# Altium PCB BW0253.PcbDoc (part 1 of 2)
Units mil, origin at the board's own origin, x right, y up, seen from the top; angles counter-clockwise.
Board outline 984.25 x 939.45 mil, 4 copper layers (Top Layer, MidLayer 1, MidLayer 2, Bottom Layer), stack 63.115 mil thick; 49 components, 37 nets, 139 pads, 74 vias.
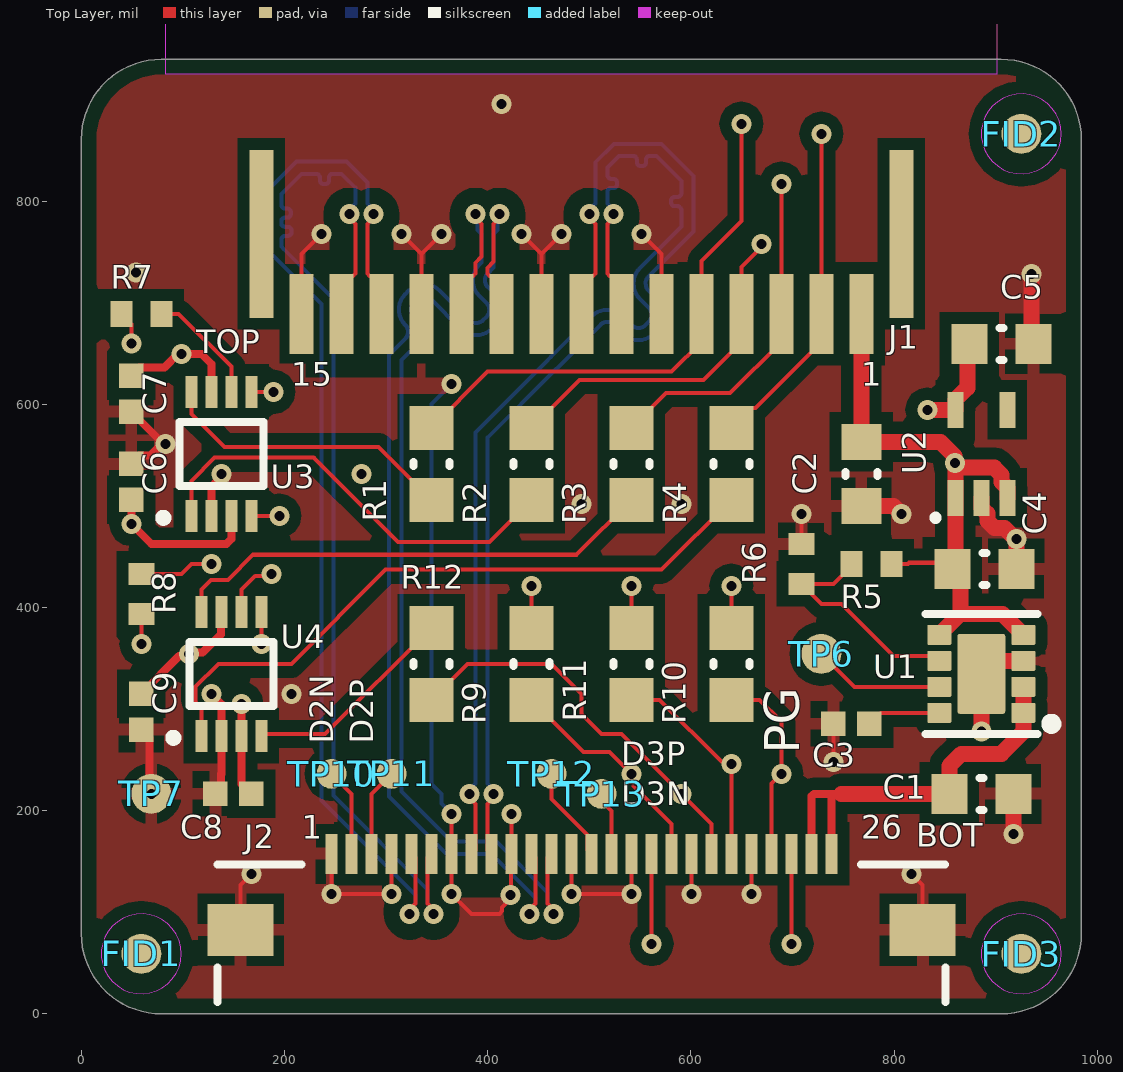
[diagram p0: Top Layer view]
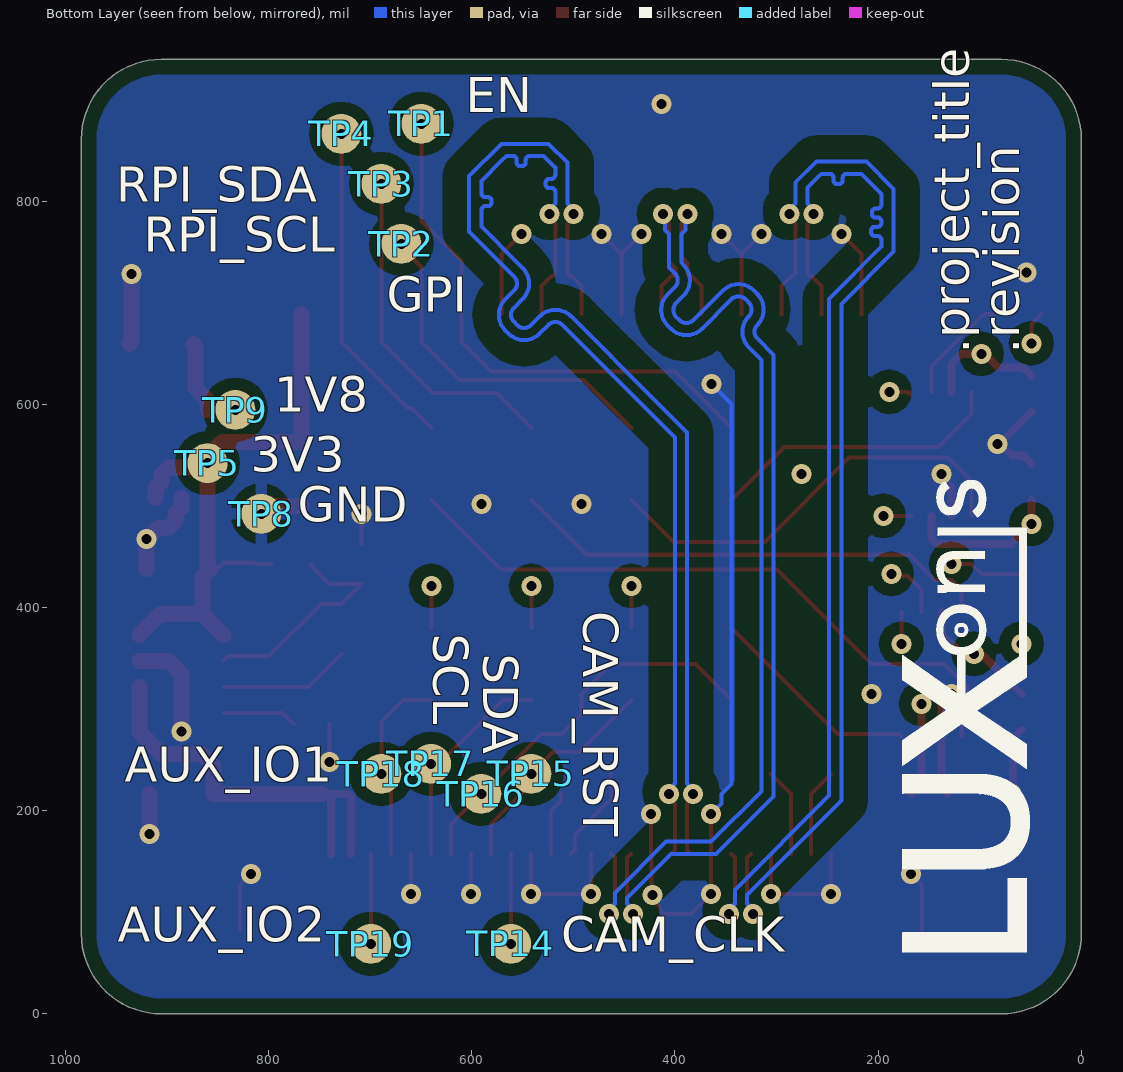
[diagram p1: Bottom Layer view, seen from below]
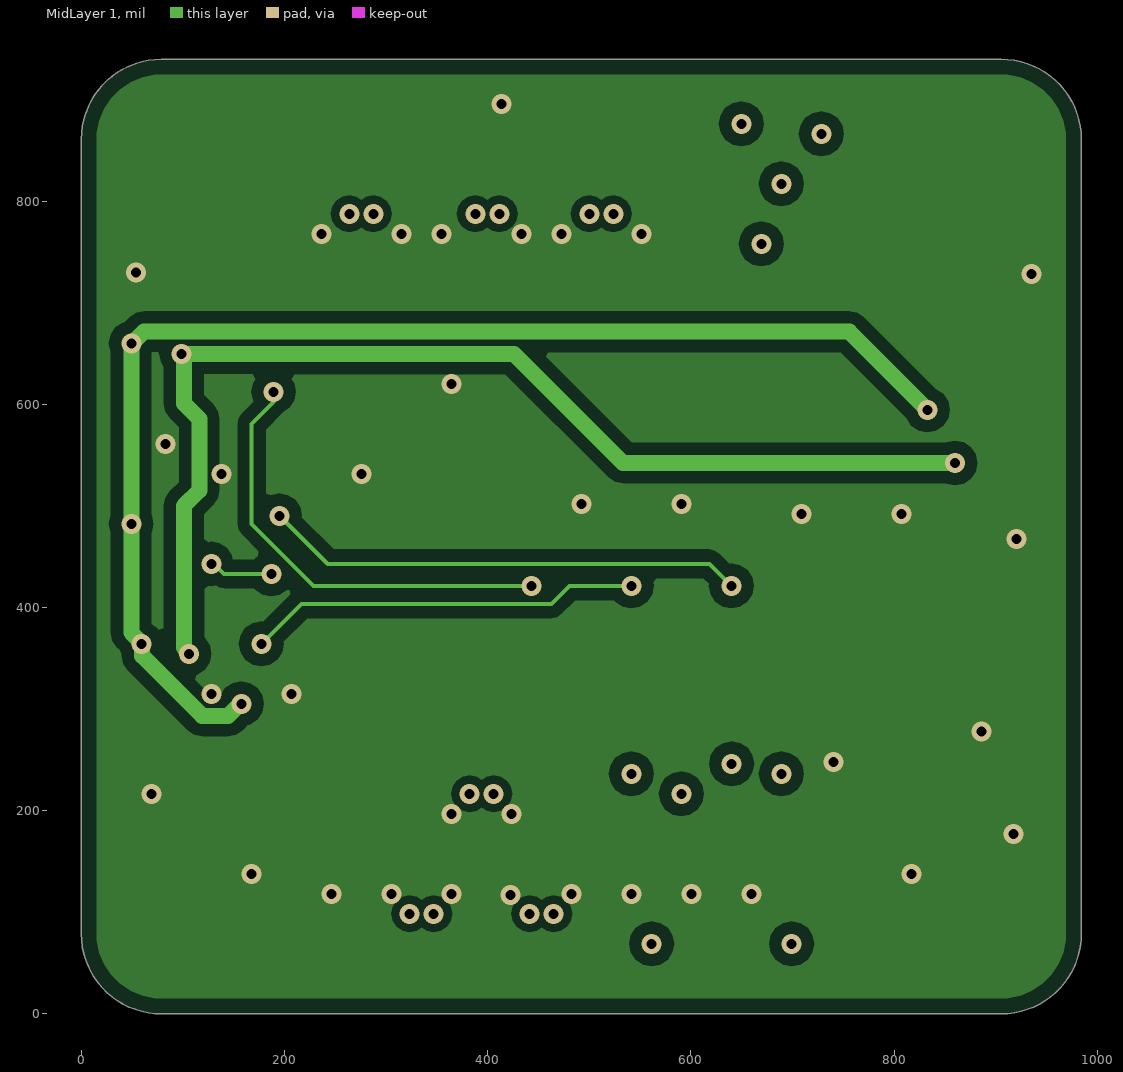
[diagram p2: MidLayer 1]
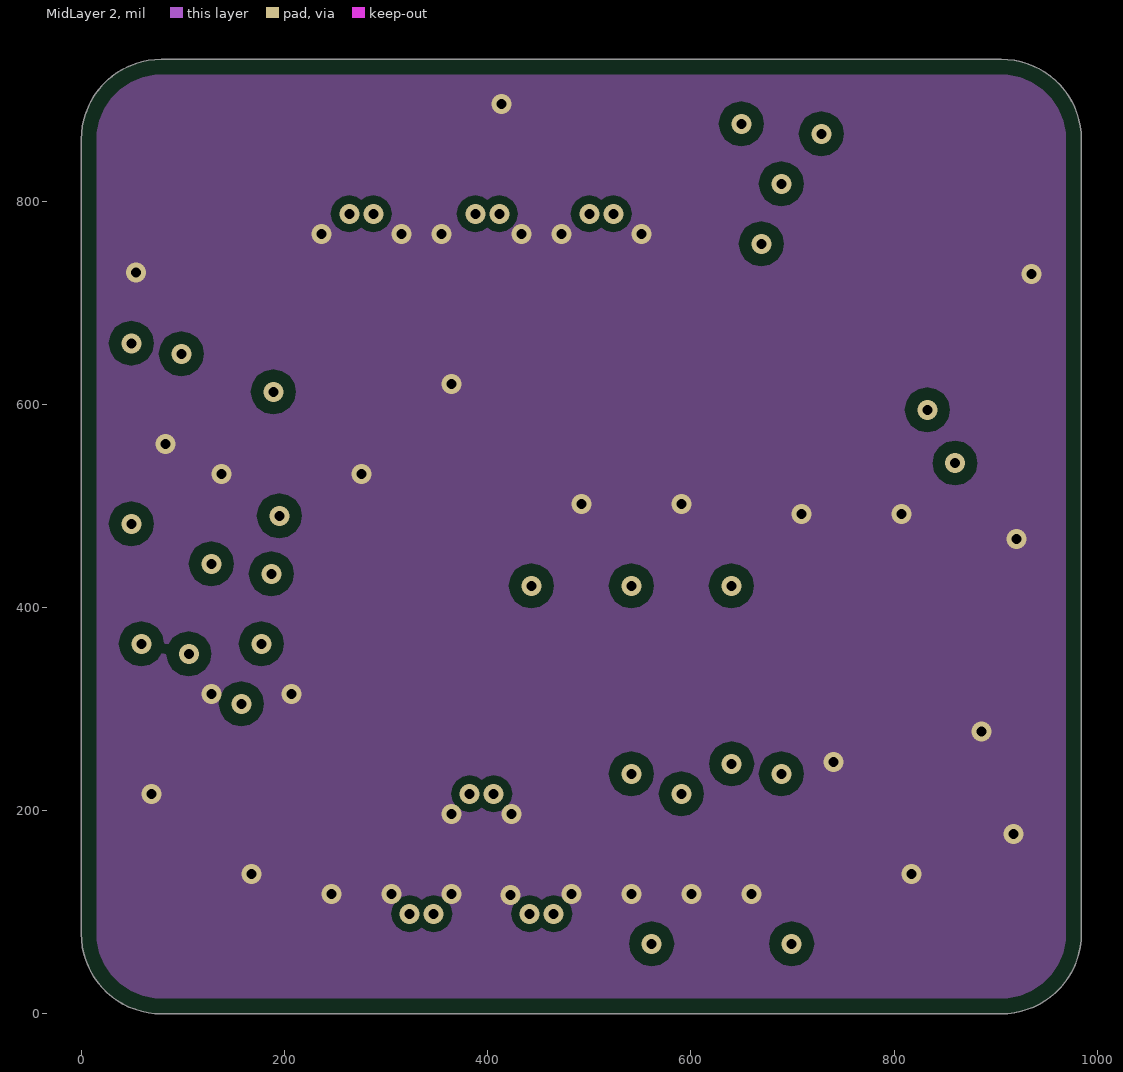
[diagram p3: MidLayer 2]

## Layer stack, top to bottom
Top Solder: solder mask 0.787, Solder Resist, Dk 3.5
Top Layer: signal copper 1.378
Dielectric1: prepreg 3.189, FR-4, Dk 4.3
MidLayer 1: signal copper 1.4
Dielectric3: core 51.181, FR-4, Dk 4.3
MidLayer 2: signal copper 1.4
Dielectric2: prepreg 3.189, FR-4, Dk 4.3
Bottom Layer: signal copper 1.378
Bottom Solder: solder mask 0.787, Solder Resist, Dk 3.5

## Board outline
0,78.74 0,860.71 cw(c78.74,860.71) 78.74,939.45 905.51,939.45 cw(c905.51,860.71) 984.25,860.71 984.25,78.74 cw(c905.51,78.74) 905.51,0 78.74,0 cw(c78.74,78.74)

## Design rules (kind name [scope] priority, off if disabled: settings)
AssemblyTestPointUsage [All] p1 off:
AssemblyTestpoint [All] p1 off: testpointundercomponent=TRUE minsize=40 maxsize=100 preferedsize=60 minholesize=0 maxholesize=40 preferedholesize=32 testpointgrid=1 usegrid=TRUE gridtolerance=0.01 allowsidetop=TRUE allowsidebottom=TRUE
BoardOutlineClearance [All] p1: gap=15 ignorepadtopadclearanceinfootprint=FALSE
Clearance Clearance_2 [InPolygon vs InNetClass('SENSORMIPI')] p1: gap=23.62 ignorepadtopadclearanceinfootprint=FALSE except(0: Arc-Hole Track-Hole SMDPad-Hole THPad-Hole Via-Hole Fill-Hole Poly-Hole Region-Hole Text-Hole; 7.87: Arc-Via Track-Via SMDPad-Via THPad-Via Via-Via Via-Fill Via-Poly Via-Region Via-Text)
Clearance Clearance_3 [InNamedPolygon('GND_L04_P018')] p2: gap=15.75 ignorepadtopadclearanceinfootprint=FALSE except(0: Arc-Hole Track-Hole SMDPad-Hole THPad-Hole Via-Hole Fill-Hole Poly-Hole Region-Hole Text-Hole)
Clearance Clearance_1 [InPolygon] p3: gap=11.81 ignorepadtopadclearanceinfootprint=FALSE except(0: Arc-Hole Track-Hole SMDPad-Hole THPad-Hole Via-Hole Fill-Hole Poly-Hole Region-Hole Text-Hole)
Clearance [All] p4: gap=4 ignorepadtopadclearanceinfootprint=FALSE
ComponentClearance [All] p1 off: gap=10 collisioncheckmode=3 verticalgap=10 showdistances=FALSE
DiffPairsRouting [InDifferentialPairClass('All Differential Pairs')] p1: maxlimit=15.75 minlimit=8 mostfreqgap=10 toplayer_prefgap=8 toplayer_minwidth=3.94 toplayer_maxwidth=4 toplayer_prefwidth=4 bottomlayer_prefgap=8 bottomlayer_minwidth=3.94 bottomlayer_maxwidth=4 bottomlayer_prefwidth=4 impedanceprofiledriven=TRUE impedanceprofileid={84B90D63-6C53-4755-9BB4-0970869BF656} impedanceprofilevalue=100.000000 maxuncoupledlength=500
FabricationTestPointUsage [All] p1 off: valid=0 allowmultiple=FALSE
FabricationTestpoint [All] p1 off: side=3 testpointundercomponent=TRUE minsize=40 maxsize=100 preferedsize=60 minholesize=0 maxholesize=40 preferedholesize=32 testpointgrid=1 allowsidetop=TRUE allowsidebottom=TRUE usegrid=TRUE gridtolerance=0.01
FanoutControl Fanout_BGA [IsBGA] p1 off: bgadir=Out bgaviamode=Centered fanoutstyle=Auto fanoutdirection=Alternating viagrid=1 // Fanout_BGA (Default Rule)
FanoutControl Fanout_LCC [IsLCC] p2 off: bgadir=Out bgaviamode=Centered fanoutstyle=Auto fanoutdirection=Alternating viagrid=1 // Fanout_LCC (Default Rule)
FanoutControl Fanout_SOIC [IsSOIC] p3 off: bgadir=Out bgaviamode=Centered fanoutstyle=Auto fanoutdirection=Alternating viagrid=1 // Fanout_SOIC (Default Rule)
FanoutControl Fanout_Small [(CompPinCount < 5)] p4 off: bgadir=Out bgaviamode=Centered fanoutstyle=Auto fanoutdirection=OutThenIn viagrid=1 // Fanout_Small (Default Rule)
FanoutControl Fanout_Default [All] p5 off: bgadir=Out bgaviamode=Centered fanoutstyle=Auto fanoutdirection=Alternating viagrid=1 // Fanout_Default (Default Rule)
Height [All] p1 off: minheight=0 maxheight=1000 prefheight=500
HoleSize [All] p1 off: absolutevalues=TRUE maxlimit=100 minlimit=5.12 maxpercent=80.000 minpercent=20.000
HoleToHoleClearance [All] p1: gap=8.27 allowstackedmicrovias=TRUE
LayerPairs [All] p1 off: enforce=TRUE
Length "InNet('CAM1_C_P') Or InNet('CAM1_D1_P')" [InNet('CAM1_C_P') Or InNet('CAM1_D1_P')] p1: maxlimit=1609.53 minlimit=0
MatchedLengths SENSORMIPI [InNetClass('SENSORMIPI')] p1: tolerance=39.37 checknetsindiffpair=FALSE checkdiffpairvsdiffpair=TRUE checkxsignals=TRUE checkothers=TRUE usedelayunits=TRUE delaytolerance=1.000000
MatchedLengths Diffs [InDifferentialPairClass('All Differential Pairs')] p2: tolerance=1 checknetsindiffpair=TRUE checkdiffpairvsdiffpair=FALSE checkxsignals=FALSE checkothers=FALSE
MinimumSolderMaskSliver [All] p1 off: minsoldermaskwidth=10
PasteMaskExpansion [All] p1 off: expansion=0
PlaneClearance [All] p1: clearance=11.81
PlaneConnect [All] p1: planeconnectstyle=Relief reliefexpansion=11.81 reliefentries=4 reliefconductorwidth=15.75 reliefairgap=11.81
PolygonConnect [All] p1: thpad.connectstyle=Direct thpad.reliefconductorwidth=11.81 thpad.reliefentries=4 thpad.polygonreliefangle="90 Angle" thpad.airgapwidth=10 smdpad.connectstyle=Relief smdpad.reliefconductorwidth=11.81 smdpad.reliefentries=4 smdpad.polygonreliefangle="90 Angle" smdpad.airgapwidth=10 via.connectstyle=Direct via.reliefconductorwidth=11.81 via.reliefentries=4 via.polygonreliefangle="90 Angle" via.airgapwidth=10
RoutingCorners [All] p1 off: cornerstyle=45-Degree minsetback=100 maxsetback=100
RoutingPriority [All] p1 off: routingpriority=0
RoutingTopology [All] p1 off: topology=Shortest
RoutingVias [All] p1: holewidth=5.91 width=10.83 viastyle="Through Hole" minholewidth=5.12 minwidth=10.83 maxholewidth=15.75 maxwidth=31.5
SMDNeckDown [All] p1 off: percent=50.000
SilkToSilkClearance [All] p1 off: silktosilkclearance=10
SilkToSolderMaskClearance SilkscreenOverComponentPads [IsPad] p1 off: minsilkscreentomaskgap=10 clearancetoexposedcopper=TRUE
SolderMaskExpansion [All] p1 off: expansion=4 istentingtop=FALSE
Width [All] p1: maxlimit=20 minlimit=4 preferedwidth=4
6 further rules are at their usual default settings.

## Classes and differential pairs
net class SENSORMIPI: MIPI_C_N MIPI_C_P MIPI_D0_N MIPI_D0_P MIPI_D1_N MIPI_D1_P
differential pair MIPI_D1: +MIPI_D1_P -MIPI_D1_N
differential pair MIPI_D0: +MIPI_D0_P -MIPI_D0_N
differential pair MIPI_C: +MIPI_C_P -MIPI_C_N

## Components (designator, comment, footprint, x,y, rotation, side; value= is the part's Value field where it differs from the comment)
C1 "22uF 0603" CAPC0603(1608)100_N 885.83,216.54 r180 top
C2 "22uF 0603" CAPC0603(1608)100_N 767.72,531.5 r270 top
C3 "10nF 0402" CAPC0402(1005)60_N 757.87,285.43 r0 top
C4 "10uF 0603" CAPC0603(1608)100_N 888.78,437.99 r180 top
C5 "10uF 0603" CAPC0603(1608)100_N 905.51,659.45 r180 top
C6 "0.1uF 0402" CAPC0402(1005)70_N 49.21,523.62 r270 top
C7 "0.1uF 0402" CAPC0402(1005)70_N 49.21,610.24 r90 top
C8 "0.1uF 0402" CAPC0402(1005)70_N 149.61,216.54 r0 top
C9 "0.1uF 0402" CAPC0402(1005)70_N 59.06,297.24 r90 top
FID1 "FIDUCIAL_ROUND_1MM" FIDUCIAL_ROUND_1MM 59.06,59.06 r180 top
FID2 "FIDUCIAL_ROUND_1MM" FIDUCIAL_ROUND_1MM 925.2,866.14 r180 top
FID3 "FIDUCIAL_ROUND_1MM" FIDUCIAL_ROUND_1MM 925.2,59.06 r180 top
J1 "SFW15R-2STE1LF Top Contact" SFW15R-2STE1LF 492.13,708.66 r180 top locked
J2 "54548-2671 Bottom Contact" 54548-2671 492.11,146.77 r0 top
R1 "0R 0603" RESC0603(1608)_M 344.49,541.34 r90 top
R2 "0R 0603" RESC0603(1608)_M 442.91,541.34 r90 top
R3 "0R 0603" RESC0603(1608)_M 541.34,541.34 r90 top
R4 "0R 0603" RESC0603(1608)_M 639.76,541.34 r90 top
R5 "121K 0402" RESC0402(1005)_N 777.56,442.91 r180 top
R6 "39.2k 0402" RESC0402(1005)_N 708.66,442.91 r90 top
R7 "10K 0402" RESC0402(1005)_N 59.06,688.98 r180 top
R8 "10K 0402" RESC0402(1005)_N 59.06,413.39 r270 top
R9 "0R 0603" RESC0603(1608)_M 442.91,344.49 r90 top
R10 "0R 0603" RESC0603(1608)_M 639.76,344.49 r90 top
R11 "0R 0603" RESC0603(1608)_M 541.34,344.49 r90 top
R12 "0R 0603" RESC0603(1608)_M 344.49,344.49 r90 top
TP1 "TP100_150_NS" TP100_150_NS 649.61,875.98 r0 bottom
TP2 "TP100_150_NS" TP100_150_NS 669.29,757.87 r0 bottom
TP3 "TP100_150_NS" TP100_150_NS 688.98,816.93 r0 bottom
TP4 "TP100_150_NS" TP100_150_NS 728.35,866.14 r0 bottom
TP5 "TP100_200_NS" TP100_200_NS 860.11,541.93 r0 bottom
TP6 "TP100_200_NS" TP100_200_NS 728.35,354.33 r180 top
TP7 "TP100_150_NS" TP100_150_NS 68.9,216.54 r180 top
TP8 "TP100_150_NS" TP100_150_NS 807.09,492.13 r0 bottom
TP9 "TP100_200_NS" TP100_200_NS 832.68,594.49 r270 bottom
TP10 "TP075_150_NS" TP075_150_NS 246.42,236.22 r270 top
TP11 "TP075_150_NS" TP075_150_NS 305.47,236.22 r270 top
TP12 "TP075_150_NS" TP075_150_NS 462.95,236.22 r270 top
TP13 "TP075_150_NS" TP075_150_NS 512.17,216.54 r270 top
TP14 "TP100_150_NS" TP100_150_NS 561.38,68.9 r270 bottom
TP15 "TP100_150_NS" TP100_150_NS 541.34,236.22 r270 bottom
TP16 "TP100_150_NS" TP100_150_NS 590.55,216.54 r270 bottom
TP17 "TP100_150_NS" TP100_150_NS 640.12,246.06 r270 bottom
TP18 "TP100_150_NS" TP100_150_NS 688.98,236.22 r270 bottom
TP19 "TP100_150_NS" TP100_150_NS 699.17,68.9 r270 bottom
U1 "TPS82130SIL" TPS82130SIL 885.83,334.65 r180 top
U2 "TLV70018DCK" TLV70018DCK 885.83,551.18 r0 top
U3 "TXS0102DCU" TXS0102DCUR 137.8,551.18 r90 top
U4 "TXS0102DCU" TXS0102DCUR 147.64,334.65 r90 top

## Footprints (in the part's own frame and the unit in brackets; to place one, negate y for a bottom-side part, rotate by r counter-clockwise, add the part's x,y. Pads: shape width x height; smd on the part's side, far side on the other; paste and mask are expansions set on the pad)
54548-2671 [mm] "26pin Molex FFC 0.5mm"
  rect 0.3x1 smd: 1(-6.241,0.272) 2(-5.741,0.272) 3(-5.241,0.272) 4(-4.741,0.272) 5(-4.241,0.272) 6(-3.741,0.272) 7(-3.241,0.272) 8(-2.741,0.272) 9(-2.241,0.272) 10(-1.741,0.272) 11(-1.241,0.272) 12(-0.741,0.272) 13(-0.241,0.272) 14(0.259,0.272) 15(0.759,0.272) 16(1.259,0.272) 17(1.759,0.272) 18(2.259,0.272) 19(2.759,0.272) 20(3.259,0.272) 21(3.759,0.272) 22(4.259,0.272) 23(4.759,0.272) 24(5.259,0.272) 25(5.759,0.272) 26(6.259,0.272)
  rect 1.65x1.3 smd: MP1(-8.516,-1.628) MP2(8.534,-1.628)
  silkscreen extent -9.09,-3.43 9.11,0, body extent -9.1,-4.55 9.1,0.45, height 1.18
CAPC0402(1005)60_N [mm] "Chip Capacitor, Body 1.0x0.5mm, Height 0.6mm, IPC Medium Density"
  rect 0.62x0.62 smd: 1(-0.45,0) 2(0.45,0)
  body extent -0.55,-0.3 0.55,0.3, height 0.6
CAPC0402(1005)70_N [mm] "Chip Capacitor, Body 1.0x0.5mm, Height 0.7mm, IPC Medium Density"
  rect 0.62x0.62 smd: 1(-0.45,0) 2(0.45,0)
  body extent -0.55,-0.3 0.55,0.3, height 0.7
CAPC0603(1608)100_N [mm] "Chip Capacitor, Body 1.6x0.8mm, Height 1.0mm, IPC Medium Density"
  rect 0.9x1 smd: 1(-0.8,0) 2(0.8,0)
  silkscreen extent -0.05,-0.4 0.05,0.4, body extent -0.87,-0.48 0.88,0.47, height 1
FIDUCIAL_ROUND_1MM [mm] "Round, 1mm dia"
  round 1 smd paste-1 mask+0.5: 1(0,0)
  Top Layer keep-out circle w0.025: c0,0 r1
RESC0402(1005)_N [mm] "Chip Resistor, Body 1.0x0.5mm, IPC Medium Density"
  rect 0.55x0.65 smd: 1(-0.5,0) 2(0.5,0)
  body extent -0.52,-0.27 0.53,0.28, height 0.4
RESC0603(1608)_M [mm] "Chip Resistor, Body 1.6x0.8mm, IPC Low Density"
  rect 1.1x1.1 smd: 1(-0.9,0) 2(0.9,0)
  silkscreen extent -0.05,-0.45 0.05,0.45, body extent -0.85,-0.47 0.85,0.47, height 0.6
SFW15R-2STE1LF [mm] "RPi Cam 15pin 2 lane MIPI top contact"
  rect 0.6x2 smd: P1(-7,0.5) P2(-6,0.5) P3(-5,0.5) P4(-4,0.5) P5(-3,0.5) P6(-2,0.5) P7(-1,0.5) P8(0,0.5) P9(1,0.5) P10(2,0.5) P11(3,0.5) P12(4,0.5) P13(5,0.5) P14(6,0.5) P15(7,0.5)
  rect 0.6x4.2 smd: S1(-8,-1.5) S2(8,-1.5)
  Top Layer keep-out region: -10.4,-9.5 10.4,-9.5 10.4,-5.5 -10.4,-5.5
  body extent -10.4,-5.5 10.4,1, height 2.7
TLV70018DCK [mm] "SC70-5 1.1mm"
  rect 0.4x0.9 smd paste-0.025 mask+0.05: 1(-0.65,-1.1) 2(0,-1.1) 3(0.65,-1.1) 4(0.65,1.1) 5(-0.65,1.1)
  silkscreen extent -1.17,-1.63 -1.12,-1.57, body extent -1.1,-1.2 1.1,1.2, height 1.1
TP075_150_NS [mm] "0.75mm dia pad, 1.5mm dia clearance, no silk screen"
  round 0.75 smd paste-2: 1(0,0)
TP100_150_NS [mm] "1mm dia pad, 1.5mm clearance, no silk screen"
  round 1 smd paste-2: 1(0,0)
TP100_200_NS [mm] "1mm dia pad, 2mm dia clearance, no silk screen"
  round 1 smd paste-2: 1(0,0)
TPS82130SIL [mm] "Non-Isolated PoL Module DC DC Converter 1 Output 0.9 ~ 5V    3A 3V - 17V Input"
  rrect10% 0.6x0.5 smd paste-0.05 mask-0.05: 1(-1.05,0.975) 2(-1.05,0.325) 3(-1.05,-0.325) 4(-1.05,-0.975) 5(1.05,-0.975) 6(1.05,-0.325) 7(1.05,0.325) 8(1.05,0.975)
  rrect10% 1.2x2 smd paste-2 mask-0.05: 9(0,0)
  silkscreen extent -1.82,-1.5 1.4,1.5, body extent -1.4,-1.5 1.4,1.5, height 1.55
TXS0102DCUR [mm] "TSSOP, 8-Leads, Body 2.00x2.30mm, Pitch 0.50mm"
  rect 0.8x0.3 smd mask+0.05: 1(-1.55,0.75) 2(-1.55,0.25) 3(-1.55,-0.25) 4(-1.55,-0.75) 5(1.55,-0.75) 6(1.55,-0.25) 7(1.55,0.25) 8(1.55,0.75)
  silkscreen extent -1.7,-1.05 0.8,1.55, body extent -1.55,-1.05 1.55,1.05, height 0.9

## Part data
C1 C2: library part GRM188R61A226ME15D, "CAP CER 22UF 10V X5R 0603 20%", Capacitance=22uF, Case Code (Imperial)=0603, Case Code (Metric)=1608, Dielectric=X5R, Manufacturer 1=Murata, Max Operating Temperature=85°C, Min Operating Temperature=-55°C, Package Quantity=4000, Supplier Part Number 1=490-10476-1-ND, Tolerance=20%, Voltage Rating=10V, Case/Package=0603, ComponentLink1Description=https://datasheet.ciiva.com/46444/1769893-46444975.pdf?src-supplier=Element14, ComponentLink1URL=https://datasheet.ciiva.com/46444/1769893-46444975.pdf?src-supplier=Element14, Depth=0.8mm, Height=0.8mm, Lead Free="Lead Free", Length=1.6mm, Manufacturer Part Number 1=GRM188R61A226ME15D, Material=Ceramic, Mount="Surface Mount", Packaging="Tape and Reel", Pricing 1="1=0.31000, 10=0.21500, 100=0.12160, 500=0.08584, 1000=0.07512 (USD)", REACH SVHC="No SVHC", RoHS=Yes, Stock 1=984716, Supplier 1=Digi-Key, Termination=SMD/SMT, Thickness=0.039inch, Voltage Rating (DC)=10V, Weight=0.000222oz, Width=0.8mm
C3: library part GRM155R71H103KA88D, "CAP CER 10000PF 50V X7R 0402", Capacitance=10nF, Case Code (Imperial)=0402, Case Code (Metric)=1005, Dielectric=X7R, Manufacturer 1=Murata, Max Operating Temperature=125°C, Min Operating Temperature=-55°C, Package Quantity=1, Supplier Part Number 1=490-4516-1-ND, Tolerance=10%, Voltage=25V, Voltage Rating=50V, Case/Package=0402, ComponentLink1Description=https://datasheet.ciiva.com/129/product-129810.pdf?src-supplier=Digi-Key, ComponentLink1URL=https://datasheet.ciiva.com/129/product-129810.pdf?src-supplier=Digi-Key, ComponentLink2Description=https://datasheet.ciiva.com/19476/1856433-19476546.pdf?src-supplier=Jameco, ComponentLink2URL=https://datasheet.ciiva.com/19476/1856433-19476546.pdf?src-supplier=Jameco, ComponentLink3Description=https://datasheet.ciiva.com/11786/0900766b80ef921d-11786340.pdf?src-supplier=RSComponents, ComponentLink3URL=https://datasheet.ciiva.com/11786/0900766b80ef921d-11786340.pdf?src-supplier=RSComponents, ComponentLink4Description=https://datasheet.ciiva.com/18100/getdatasheetpartid-27434-18100660.pdf?src-supplier=Verical, ComponentLink4URL=https://datasheet.ciiva.com/18100/getdatasheetpartid-27434-18100660.pdf?src-supplier=Verical, ComponentLink5Description=https://datasheet.ciiva.com/22698/1747449-22698420.pdf?src-supplier=Element14, ComponentLink5URL=https://datasheet.ciiva.com/22698/1747449-22698420.pdf?src-supplier=Element14, ComponentLink6Description=https://datasheet.ciiva.com/29199/454225-da-01-en-vs-kondensator-0402-29199740.pdf?src-supplier=Conrad, ComponentLink6URL=https://datasheet.ciiva.com/29199/454225-da-01-en-vs-kondensator-0402-29199740.pdf?src-supplier=Conrad, ComponentLink7Description=https://datasheet.ciiva.com/129/grm155r71h103ka88-01-129811.pdf?src-supplier=Digi-Key, ComponentLink7URL=https://datasheet.ciiva.com/129/grm155r71h103ka88-01-129811.pdf?src-supplier=Digi-Key, ComponentLink8Description=https://datasheet.ciiva.com/129/grm155r71h103ka88-01-129812.pdf?src-supplier=Digi-Key, ComponentLink8URL=https://datasheet.ciiva.com/129/grm155r71h103ka88-01-129812.pdf?src-supplier=Digi-Key, ComponentLink9Description=https://datasheet.ciiva.com/16495/product-16495290.pdf?src-supplier=Future+Electronics, ComponentLink9URL=https://datasheet.ciiva.com/16495/product-16495290.pdf?src-supplier=Future+Electronics, ComponentLink10Description=https://datasheet.ciiva.com/5410/product-5410990.pdf?src-supplier=Mouser, ComponentLink10URL=https://datasheet.ciiva.com/5410/product-5410990.pdf?src-supplier=Mouser, Depth=0.5mm, Height=0.5mm, Lead Free="Lead Free", Length=1mm, Manufacturer Part Number 1=GRM155R71H103KA88D, Material=Ceramic, Mount="Surface Mount", Number of Pins=2, Packaging="Tape and Reel", Pricing 1="1=0.10000, 10=0.03800, 100=0.01690, 500=0.01208, 1000=0.00949, 2500=0.00862, 5000=0.00794 (USD)", Radiation Hardening=No, REACH SVHC="No SVHC", RoHS=Yes, Stock 1=6923572, Supplier 1=Digi-Key, Supplier 2=Mouser, Supplier 3=Arrow, Supplier Part Number 2=81-GRM155R71H103KA8D, Supplier Part Number 3=GRM155R71H103KA88D, Termination=SMD/SMT, Thickness=0.022inch, Voltage Rating (DC)=50V, Width=0.02inch
C4 C5: library part GRM188R61A106ME69D, "CAP CER 10UF 10V X5R 0603 20%", Capacitance=10uF, Case Code (Imperial)=0603, Case Code (Metric)=1608, Dielectric=X5R, Manufacturer 1=Murata, Max Operating Temperature=85°C, Min Operating Temperature=-55°C, Package Quantity=4000, Supplier Part Number 1=490-10475-1-ND, Tolerance=20%, Voltage Rating=10V, Case/Package=0603, ComponentLink1Description=http://www.mouser.com/ds/2/281/c02e-2905.pdf?src-supplier=Mouser, ComponentLink1URL=http://www.mouser.com/ds/2/281/c02e-2905.pdf?src-supplier=Mouser, ComponentLink2Description=http://components.arrow.com/part/dataview/0323_06119472?src-supplier=Arrow+Europe, ComponentLink2URL=http://components.arrow.com/part/dataview/0323_06119472?src-supplier=Arrow+Europe, ComponentLink3Description=http://www.farnell.com/datasheets/2048014.pdf?src-supplier=Farnell, ComponentLink3URL=http://www.farnell.com/datasheets/2048014.pdf?src-supplier=Farnell, ComponentLink4Description=http://www.farnell.com/datasheets/1872210.pdf?src-supplier=Farnell, ComponentLink4URL=http://www.farnell.com/datasheets/1872210.pdf?src-supplier=Farnell, ComponentLink5Description=http://search.murata.co.jp/Ceramy/image/img/A01X/G101/ENG/GRM188R61A106ME69-01.pdf?src-supplier=Digi-Key, ComponentLink5URL=http://search.murata.co.jp/Ceramy/image/img/A01X/G101/ENG/GRM188R61A106ME69-01.pdf?src-supplier=Digi-Key, ComponentLink6Description=http://www.farnell.com/datasheets/1872210.pdf?src-supplier=Newark, ComponentLink6URL=http://www.farnell.com/datasheets/1872210.pdf?src-supplier=Newark, ComponentLink7Description=http://www.farnell.com/datasheets/2048014.pdf?src-supplier=Element14, ComponentLink7URL=http://www.farnell.com/datasheets/2048014.pdf?src-supplier=Element14, ComponentLink8Description=http://www.farnell.com/datasheets/2048014.pdf?src-supplier=Newark, ComponentLink8URL=http://www.farnell.com/datasheets/2048014.pdf?src-supplier=Newark, Depth=0.8mm, Height=0.8mm, Lead Free="Lead Free", Length=1.6mm, Manufacturer Part Number 1=GRM188R61A106ME69D, Material=Ceramic, Mount="Surface Mount", Packaging="Tape and Reel", Pricing 1="1=0.21000, 10=0.14100, 100=0.07130, 500=0.04876, 1000=0.04313 (USD)", REACH SVHC=Unknown, RoHS=Yes, Stock 1=2873098, Supplier 1=Digi-Key, Termination=SMD/SMT, Thickness=0.035inch, Voltage Rating (DC)=10V, Weight=0.000222oz, Width=0.8mm
C6 C7 C8 C9: library part GRM155R71A104JA01D, "CAP CER 0.1UF 10V X7R 0402 5%", Capacitance=100nF, Case Code (Imperial)=0402, Case Code (Metric)=1005, Dielectric=X7R, Manufacturer 1=Murata, Max Operating Temperature=125°C, Min Operating Temperature=-55°C, Package Quantity=10000, Supplier Part Number 1=490-10777-1-ND, Tolerance=5%, Voltage Rating=10V, Case/Package=0402, ComponentLink1Description=https://datasheet.ciiva.com/5411/product-5411135.pdf?src-supplier=Mouser, ComponentLink1URL=https://datasheet.ciiva.com/5411/product-5411135.pdf?src-supplier=Mouser, ComponentLink2Description=https://datasheet.ciiva.com/11618/c02e-11618821.pdf?src-supplier=Avnet, ComponentLink2URL=https://datasheet.ciiva.com/11618/c02e-11618821.pdf?src-supplier=Avnet, Depth=0.5mm, Height=0.5mm, Lead Free="Lead Free", Length=1mm, Manufacturer Part Number 1=GRM155R71A104JA01D, Mount="Surface Mount", Packaging="Tape and Reel", Pricing 1="1=0.10000, 10=0.02500, 100=0.01130, 500=0.00806, 1000=0.00633, 2500=0.00575, 5000=0.00529 (USD)", Radiation Hardening=No, RoHS=Yes, Stock 1=1346709, Supplier 1=Digi-Key, Termination=SMD/SMT, Thickness=0.022inch, Voltage Rating (DC)=10V, Width=0.02inch
FID1 FID2 FID3: library part FIDUCIAL, "Fiducial with various available footprints"
J1: library part SFW15R-2STE1LF, "CONN FFC FPC TOP 15POS 1MM R/A", Contact Resistance=30mR, Current Rating=1A, Flammability Rating="UL94 V-0", Housing Color=Brown, Insulation Resistance=500MR, Manufacturer=Amphenol, Manufacturer 1="Amphenol FCI", Max Operating Temperature=105°C, Max Voltage Rating (AC)=100V, Min Operating Temperature=-55°C, Package Quantity=2000, Supplier Part Number 1=609-1906-1-ND, Actuator Material=Glass, Component Subtype=FPC/FFC, Component Type=Connector, ComponentLink1Description=https://datasheet.ciiva.com/670/sfw12lf-670088.pdf?src-supplier=Digi-Key, ComponentLink1URL=https://datasheet.ciiva.com/670/sfw12lf-670088.pdf?src-supplier=Digi-Key, ComponentLink2Description=https://datasheet.ciiva.com/670/sfw12lf-670089.pdf?src-supplier=Digi-Key, ComponentLink2URL=https://datasheet.ciiva.com/670/sfw12lf-670089.pdf?src-supplier=Digi-Key, ComponentLink3Description=https://datasheet.ciiva.com/670/sfw12lf-670090.pdf?src-supplier=Digi-Key, ComponentLink3URL=https://datasheet.ciiva.com/670/sfw12lf-670090.pdf?src-supplier=Digi-Key, ComponentLink4Description=https://datasheet.ciiva.com/5138/sfw12lf-5138988.pdf?src-supplier=Mouser, ComponentLink4URL=https://datasheet.ciiva.com/5138/sfw12lf-5138988.pdf?src-supplier=Mouser, ComponentLink5Description=http://datasheet.octopart.com/SFW15R-2STE1LF-Areva-datasheet-119238.pdf?src-supplier=Mouser, ComponentLink5URL=http://datasheet.octopart.com/SFW15R-2STE1LF-Areva-datasheet-119238.pdf?src-supplier=Mouser, ComponentLink6Description=http://datasheet.octopart.com/SFW15R-2STE1LF-Areva-datasheet-8760026.pdf?src-supplier=_legacy+Avnet, ComponentLink6URL=http://datasheet.octopart.com/SFW15R-2STE1LF-Areva-datasheet-8760026.pdf?src-supplier=_legacy+Avnet, ComponentLink7Description=http://datasheet.octopart.com/SFW15R-2STE1LF-Amphenol-datasheet-94059633.pdf?src-supplier=Newark, ComponentLink7URL=http://datasheet.octopart.com/SFW15R-2STE1LF-Amphenol-datasheet-94059633.pdf?src-supplier=Newark, ComponentLink8Description=http://datasheet.octopart.com/SFW15R-2STE1LF-Amphenol-ICC-datasheet-94059633.pdf?src-supplier=Farnell, ComponentLink8URL=http://datasheet.octopart.com/SFW15R-2STE1LF-Amphenol-ICC-datasheet-94059633.pdf?src-supplier=Farnell, ComponentLink9Description=http://datasheet.octopart.com/SFW15R-2STE1LF-Amphenol-ICC-datasheet-8760026.pdf?src-supplier=Future+Electronics, ComponentLink9URL=http://datasheet.octopart.com/SFW15R-2STE1LF-Amphenol-ICC-datasheet-8760026.pdf?src-supplier=Future+Electronics, Contact Location=Top, Contact Material=Bronze, Contact Plating=Tin, Depth=6mm, Housing Material=Polyphenylene, Lead Free="Lead Free", Length=20.8mm, Manufacturer 2="Amphenol FCI", Manufacturer 3="Amphenol FCI", Manufacturer Part Number 1=SFW15R-2STE1LF, Manufacturer Part Number 2=SFW15R-2STE1LF, Manufacturer Part Number 3=SFW15R-2STE1LF, Manufacturer PN=SFW15R-2STE1LF, Mount=SMT, Number of Contacts=15, Number of Positions=15, Number of Rows=1, Orientation="Right Angle", Packaging="Tape and Reel", Pitch=1mm, Pricing 1="1=0.51000, 10=0.48200, 25=0.43400, 50=0.38580, 100=0.36960, 250=0.33748, 500=0.32142, 1000=0.26517 (USD)", Pricing 2="1=0.51000, 10=0.48200, 25=0.43400, 50=0.38580, 100=0.36960, 250=0.33748, 500=0.32142, 1000=0.26517 (USD)", Pricing 3="1=0.46000, 10=0.35000, 100=0.33600, 500=0.29200, 1000=0.24100, 2000=0.21900, 4000=0.21100, 10000=0.19700, 24000=0.19400 (USD)", RoHS=Yes, Stock 1=4348, Stock 2=4348, Stock 3=4218, Supplier 1=Digi-Key, Supplier 2=Digi-Key, Supplier 3=Mouser, Supplier Part Number 2=609-1906-6-ND, Supplier Part Number 3=649-SFW15R-2STE1LF, Termination=Solder, Voltage Rating=100V, Voltage Rating (AC)=100V, Width=5.5mm, Wire/Cable Type=Straight
J2: library part 54548-2671, "CONN FFC BOTTOM 26POS 0.50MM R/A 26 Position FFC, FPC Connector Contacts, Bottom 0.020\" (0.50mm) Surface Mount, Right Angle", Contact Resistance=40mR, Current Rating=500mA, Flammability Rating="UL94 V-0", Housing Color=Black, Manufacturer 1=Molex, Max Operating Temperature=85°C, Min Operating Temperature=-20°C, Mouser Part Number=538-54548-2671, Package Quantity=750, Voltage Rating=50V, Actuator Material=Polyphenylene, ComponentLink1Description=https://datasheet.ciiva.com/5137/0545482671-ffc-fpc-connectors-146697-5137857.pdf?src-supplier=Mouser, ComponentLink1URL=https://datasheet.ciiva.com/5137/0545482671-ffc-fpc-connectors-146697-5137857.pdf?src-supplier=Mouser, Contact Material=Bronze, Contact Plating=Gold, Datasheet Link=https://www.molex.com/molex/products/datasheet.jsp?part=active/0545482671_FFC_FPC_CONNECTORS.xml&channel=Products&Lang=en-US, Depth=5mm, Height=1mm, Housing Material=Polymer, Length=18.2mm, Manufacturer 2=Molex, Manufacturer Part Number 1=54548-2671, Manufacturer Part Number 2=54548-2671, Manufacturer_Name=Molex, Manufacturer_Part_Number=54548-2671, Mount="Surface Mount", Mouser Price/Stock=https://eu.mouser.com/ProductDetail/Molex/54548-2671?qs=sGAEpiMZZMs7i6cT6ogu49DbkzKdWzYdwOJCTNigfgU%3D, Number of Contacts=26, Number of Positions=26, Number of Rows=1, Orientation="Right Angle", Packaging="Tape and Reel", Pitch=0.5mm, Pricing 1="1=3.03000, 10=2.86000, 25=2.55000, 100=2.42000, 250=2.12000, 500=2.07000 (USD)", Pricing 2="1=3.50200, 10=3.34800, 25=3.06600, 100=2.78390, 250=2.43800, 500=2.41400, 1000=2.25990, 3000=2.10600, 6000=1.95200, 12000=1.73300, 24000=1.71600, 48000=1.69900, 60000=1.68200 (USD)", RoHS=Yes, Stock 1=6344, Stock 2=11173, Supplier 1=Mouser, Supplier 2=Arrow, Supplier Part Number 1=538-54548-2671, Supplier Part Number 2=0545482671, System=Connector, Termination=Solder, Wire/Cable Type=Straight
R1 R2 R3 R4 R9 R10 R11 R12: library part CRCW06030000Z0EA, "RES SMD 0 OHM JUMPER 1/10W 0603 0 Ohms Jumper 0.1W, 1/10W Chip Resistor 0603 (1608 Metric) Automotive AEC-Q200 Thick Film", Case Code (Imperial)=0603, Case Code (Metric)=1608, Current Rating=2A, Manufacturer 1=Vishay, Manufacturer Part Number 1=CRCW0603-0000Z0EA, Max Operating Temperature=155°C, Max Power Dissipation=100mW, Min Operating Temperature=-55°C, Package Quantity=1, Resistance=0mR, Supplier Part Number 1=541-0.0GCT-ND, Temperature Coefficient=100ppm/°C, Tolerance=5%, Voltage Rating=75V, Case/Package=0603, ComponentLink1Description=https://datasheet.ciiva.com/2461/dcrcwe3-2461968.pdf?src-supplier=Digi-Key, ComponentLink1URL=https://datasheet.ciiva.com/2461/dcrcwe3-2461968.pdf?src-supplier=Digi-Key, ComponentLink2Description=https://datasheet.ciiva.com/2461/dcrcwe3-2461969.pdf?src-supplier=Digi-Key, ComponentLink2URL=https://datasheet.ciiva.com/2461/dcrcwe3-2461969.pdf?src-supplier=Digi-Key, ComponentLink3Description=https://datasheet.ciiva.com/2461/dcrcwe3-2461970.pdf?src-supplier=Digi-Key, ComponentLink3URL=https://datasheet.ciiva.com/2461/dcrcwe3-2461970.pdf?src-supplier=Digi-Key, ComponentLink4Description=https://datasheet.ciiva.com/8340/dcrcwe3-8340197.pdf?src-supplier=Avnet, ComponentLink4URL=https://datasheet.ciiva.com/8340/dcrcwe3-8340197.pdf?src-supplier=Avnet, ComponentLink5Description=https://datasheet.ciiva.com/16941/dcrcw-16941302.pdf?src-supplier=Avnet+Europe, ComponentLink5URL=https://datasheet.ciiva.com/16941/dcrcw-16941302.pdf?src-supplier=Avnet+Europe, ComponentLink6Description=https://datasheet.ciiva.com/16199/dcrcwe3-16199063.pdf?src-supplier=Future+Electronics, ComponentLink6URL=https://datasheet.ciiva.com/16199/dcrcwe3-16199063.pdf?src-supplier=Future+Electronics, ComponentLink7Description=https://datasheet.ciiva.com/16725/70201119-16725175.pdf?src-supplier=Allied+Electronics, ComponentLink7URL=https://datasheet.ciiva.com/16725/70201119-16725175.pdf?src-supplier=Allied+Electronics, ComponentLink8Description=https://datasheet.ciiva.com/26316/fld-crcw-e3-data-en-26316615.pdf?src-supplier=Distrelec, ComponentLink8URL=https://datasheet.ciiva.com/26316/fld-crcw-e3-data-en-26316615.pdf?src-supplier=Distrelec, ComponentLink9Description=https://datasheet.ciiva.com/5544/dcrcwe3-109170-5544344.pdf?src-supplier=Mouser, ComponentLink9URL=https://datasheet.ciiva.com/5544/dcrcwe3-109170-5544344.pdf?src-supplier=Mouser, ComponentLink10Description=https://datasheet.ciiva.com/7841/1720486-7841816.pdf?src-supplier=Element14, ComponentLink10URL=https://datasheet.ciiva.com/7841/1720486-7841816.pdf?src-supplier=Element14, ComponentLink11Description=https://datasheet.ciiva.com/7841/1720486-7841817.pdf?src-supplier=Element14, ComponentLink11URL=https://datasheet.ciiva.com/7841/1720486-7841817.pdf?src-supplier=Element14, ComponentLink12Description=https://datasheet.ciiva.com/7841/125364-7841818.pdf?src-supplier=Element14, ComponentLink12URL=https://datasheet.ciiva.com/7841/125364-7841818.pdf?src-supplier=Element14, ComponentLink13Description=https://datasheet.ciiva.com/16721/70201119-16721450.pdf?src-supplier=Allied+Electronics, ComponentLink13URL=https://datasheet.ciiva.com/16721/70201119-16721450.pdf?src-supplier=Allied+Electronics, Composition="Thick Film", Contact Plating=Tin,Lead, Depth=0.85mm, Features="Automotive AEC-Q200", Height=0.02inch, Lead Free="Lead Free", Length=1.55mm, Military Standard=Not, Mount="Surface Mount", Number of Terminations=2, Packaging="Tape and Reel", Power Rating=100mW, Pricing 1="1=0.100000, 10=0.034000, 25=0.024400, 50=0.018600, 100=0.013800, 250=0.010480, 500=0.008400, 1000=0.006180 (USD)", Radiation Hardening=No, REACH SVHC=Unknown, RoHS=Yes, Stock 1=742743, Supplier 1=Digi-Key, Termination=SMD/SMT, Voltage Rating (DC)=75V, Weight=7.1E-05oz, Width=0.033inch, Working Voltage=75V
R5: library part RC0402FR-07121KL, "RES SMD 121K OHM 1% 1/16W 0402", Case Code (Imperial)=0402, Case Code (Metric)=1005, Manufacturer 1=Yageo, Max Operating Temperature=155°C, Max Power Dissipation=63mW, Min Operating Temperature=-55°C, Package Quantity=1, Power Rating=62.5mW, Resistance=121kR, Supplier Part Number 1=311-121KLRCT-ND, Temperature Coefficient=100ppm/°C, Tolerance=1%, Voltage Rating=50V, Case/Package=0402, ComponentLink1Description=https://datasheet.ciiva.com/2453/pyu-r-int-thick-7-2453445.pdf?src-supplier=Digi-Key, ComponentLink1URL=https://datasheet.ciiva.com/2453/pyu-r-int-thick-7-2453445.pdf?src-supplier=Digi-Key, ComponentLink2Description=https://datasheet.ciiva.com/2453/pyu-r-int-thick-7-2453446.pdf?src-supplier=Digi-Key, ComponentLink2URL=https://datasheet.ciiva.com/2453/pyu-r-int-thick-7-2453446.pdf?src-supplier=Digi-Key, ComponentLink3Description=https://datasheet.ciiva.com/2453/pyu-r-int-thick-7-2453447.pdf?src-supplier=Digi-Key, ComponentLink3URL=https://datasheet.ciiva.com/2453/pyu-r-int-thick-7-2453447.pdf?src-supplier=Digi-Key, Composition="Thick Film", Depth=0.5mm, Features="Moisture Resistant", Height=0.016inch, Lead Free="Lead Free", Length=1mm, Manufacturer Part Number 1=RC0402FR-07121KL, Military Standard=Not, Number of Terminations=2, Packaging="Tape and Reel", Pricing 1="1=0.10000, 10=0.01600, 100=0.00640, 1000=0.00289, 2500=0.00251, 5000=0.00207 (USD)", REACH SVHC="No SVHC", RoHS=Yes, Stock 1=412120, Supplier 1=Digi-Key, Supplier 2=Newark, Supplier 3=Mouser, Supplier Part Number 2=67R9895, Supplier Part Number 3=603-RC0402FR-07121KL, Termination=SMD/SMT, Voltage Rating (DC)=50V, Width=0.5mm, Working Voltage=50V
R6: library part CRCW040239K2FKED, "RES SMD 39.2K OHM 1% 1/16W 0402", Case Code (Imperial)=0402, Case Code (Metric)=1005, Manufacturer 1=Vishay, Max Operating Temperature=155°C, Max Power Dissipation=63mW, Min Operating Temperature=-55°C, Package Quantity=10, Resistance=39.2kR, Supplier Part Number 1=541-39.2KLCT-ND, Temperature Coefficient=100ppm/°C, Tolerance=1%, Voltage Rating=50V, Case/Package=0402, ComponentLink1Description=https://datasheet.ciiva.com/11818/0900766b80d98824-11818068.pdf?src-supplier=RSComponents, ComponentLink1URL=https://datasheet.ciiva.com/11818/0900766b80d98824-11818068.pdf?src-supplier=RSComponents, ComponentLink2Description=https://datasheet.ciiva.com/16882/dcrcwe3-16882152.pdf?src-supplier=Avnet+Europe, ComponentLink2URL=https://datasheet.ciiva.com/16882/dcrcwe3-16882152.pdf?src-supplier=Avnet+Europe, ComponentLink3Description=https://datasheet.ciiva.com/2463/dcrcwe3-2463561.pdf?src-supplier=Digi-Key, ComponentLink3URL=https://datasheet.ciiva.com/2463/dcrcwe3-2463561.pdf?src-supplier=Digi-Key, ComponentLink4Description=https://datasheet.ciiva.com/3256/dcrcwe3-3256469.pdf?src-supplier=Avnet, ComponentLink4URL=https://datasheet.ciiva.com/3256/dcrcwe3-3256469.pdf?src-supplier=Avnet, ComponentLink5Description=https://datasheet.ciiva.com/2463/dcrcwe3-2463559.pdf?src-supplier=Digi-Key, ComponentLink5URL=https://datasheet.ciiva.com/2463/dcrcwe3-2463559.pdf?src-supplier=Digi-Key, ComponentLink6Description=https://datasheet.ciiva.com/2463/dcrcwe3-2463560.pdf?src-supplier=Digi-Key, ComponentLink6URL=https://datasheet.ciiva.com/2463/dcrcwe3-2463560.pdf?src-supplier=Digi-Key, ComponentLink7Description=https://datasheet.ciiva.com/16774/70201119-16774809.pdf?src-supplier=Allied+Electronics, ComponentLink7URL=https://datasheet.ciiva.com/16774/70201119-16774809.pdf?src-supplier=Allied+Electronics, ComponentLink8Description=https://datasheet.ciiva.com/22869/70201119-22869593.pdf?src-supplier=Allied+Electronics, ComponentLink8URL=https://datasheet.ciiva.com/22869/70201119-22869593.pdf?src-supplier=Allied+Electronics, ComponentLink9Description=https://datasheet.ciiva.com/16429/dcrcwe3-16429962.pdf?src-supplier=Future+Electronics, ComponentLink9URL=https://datasheet.ciiva.com/16429/dcrcwe3-16429962.pdf?src-supplier=Future+Electronics, ComponentLink10Description=https://datasheet.ciiva.com/7671/1697337-7671596.pdf?src-supplier=Element14, ComponentLink10URL=https://datasheet.ciiva.com/7671/1697337-7671596.pdf?src-supplier=Element14, ComponentLink11Description=https://datasheet.ciiva.com/7671/1533075-7671772.pdf?src-supplier=Element14, ComponentLink11URL=https://datasheet.ciiva.com/7671/1533075-7671772.pdf?src-supplier=Element14, Composition="Thick Film", Contact Plating=Tin, Depth=0.5mm, Features="Automotive AEC-Q200", Height=0.35mm, Lead Free="Lead Free", Length=1mm, Manufacturer Part Number 1=CRCW040239K2FKED, Military Standard=Not, Number of Pins=2, Number of Terminations=2, Packaging="Tape and Reel", Power Rating=63mW, Pricing 1="1=0.10000, 10=0.03800, 100=0.01540, 1000=0.00690, 2500=0.00599, 5000=0.00495 (USD)", Radiation Hardening=No, REACH SVHC=Unknown, RoHS=Yes, Stock 1=46258, Supplier 1=Digi-Key, Termination=SMD/SMT, Voltage Rating (DC)=50V, Weight=2.3E-05oz, Width=0.5mm
R7 R8: library part RC0402FR-1310KL, "RES SMD 10K OHM 1% 0402 1/16W Chip Resistor, 0402 [1005 Metric], 10 kohm, RC Series, 50 V, Thick Film, 62.5 mW", Case Code (Imperial)=0402, Case Code (Metric)=1005, Manufacturer 1=Yageo, Max Operating Temperature=155°C, Min Operating Temperature=-55°C, Power Rating=62.5mW, Resistance=10kR, Supplier Part Number 1=67R9960, Temperature Coefficient=100ppm/°C, Tolerance=1%, Voltage Rating=50V, Case/Package=0402, ComponentLink1Description=https://datasheet.ciiva.com/16940/pyu-rc0402-51-rohs-l-6-16940293.pdf?src-supplier=Avnet+Europe, ComponentLink1URL=https://datasheet.ciiva.com/16940/pyu-rc0402-51-rohs-l-6-16940293.pdf?src-supplier=Avnet+Europe, ComponentLink2Description=https://datasheet.ciiva.com/28386/pyu-rc0402-51-rohs-l-6-28386855.pdf?src-supplier=Avnet+Europe, ComponentLink2URL=https://datasheet.ciiva.com/28386/pyu-rc0402-51-rohs-l-6-28386855.pdf?src-supplier=Avnet+Europe, ComponentLink3Description=https://datasheet.ciiva.com/16740/pyu-rc0402-51-rohs-l-6-r-16740602.pdf?src-supplier=Future+Electronics, ComponentLink3URL=https://datasheet.ciiva.com/16740/pyu-rc0402-51-rohs-l-6-r-16740602.pdf?src-supplier=Future+Electronics, ComponentLink4Description=https://datasheet.ciiva.com/8891/pyu-rc0402-51-rohs-l-6-8891339.pdf?src-supplier=Avnet, ComponentLink4URL=https://datasheet.ciiva.com/8891/pyu-rc0402-51-rohs-l-6-8891339.pdf?src-supplier=Avnet, ComponentLink5Description=https://datasheet.ciiva.com/5557/pyu-rc0402-51-rohs-l-6-r-5557997.pdf?src-supplier=Mouser, ComponentLink5URL=https://datasheet.ciiva.com/5557/pyu-rc0402-51-rohs-l-6-r-5557997.pdf?src-supplier=Mouser, ComponentLink6Description=https://datasheet.ciiva.com/7983/1018594-7983533.pdf?src-supplier=Element14, ComponentLink6URL=https://datasheet.ciiva.com/7983/1018594-7983533.pdf?src-supplier=Element14, Composition="Thick Film", Contact Plating=Tin,Matte,Lead, Depth=0.5mm, Lead Free="Lead Free", Length=1mm, Manufacturer Part Number 1=RC0402FR-1310KL, Military Standard=Not, Number of Pins=2, Number of Terminations=2, Packaging="Tape and Reel", Pricing 1="1=0.10000, 25=0.01200, 100=0.00400, 250=0.00400, 500=0.00300, 1000=0.00300 (USD)", Radiation Hardening=No, REACH SVHC="No SVHC", RoHS=Yes, Stock 1=62239, Supplier 1=Newark, Supplier 2="Future Electronics", Supplier 3=Mouser, Supplier 4=Element14, Supplier Part Number 2=RC0402FR-1310KL-CUTT, Supplier Part Number 3=603-RC0402FR-1310KL, Supplier Part Number 4=1799235, Termination=SMD/SMT, Voltage Rating (DC)=50V, Working Voltage=50V
TP1 TP2 TP3 TP4 TP5 TP6 TP7 TP8 TP9 TP10 TP11 TP12 TP13 TP14 TP15 TP16 TP17 TP18 TP19: library part TEST_POINT
U1: "DC DC CONVERTER 0.9-5V", Case/Package=SMD/SMT, Manufacturer 1="Texas Instruments", Manufacturer Part Number 1=TPS82130SILR, Max Input Voltage=17V, Max Operating Temperature=125°C, Max Output Current=3A, Min Input Voltage=3V, Min Operating Temperature=-40°C, Quiescent Current=20uA, Supplier Part Number 1=595-TPS82130SILR, Voltage - Output 1=5V, Category="Voltage Regulators - Switching", ComponentLink1Description=http://www.ti.com/lit/ds/symlink/tps82130.pdf?src-supplier=Digi-Key, ComponentLink1URL=http://www.ti.com/lit/ds/symlink/tps82130.pdf?src-supplier=Digi-Key, ComponentLink2Description=http://www.ti.com/lit/ds/symlink/tps82130.pdf?src-supplier=Newark, ComponentLink2URL=http://www.ti.com/lit/ds/symlink/tps82130.pdf?src-supplier=Newark, ComponentLink3Description=http://www.ti.com/lit/gpn/tps82130?src-supplier=Mouser, ComponentLink3URL=http://www.ti.com/lit/gpn/tps82130?src-supplier=Mouser, Features=OTP, Height=0.06inch, Lead Free="Lead Free", Length=0.12inch, Mount="Surface Mount", Number of Outputs=1, Packaging="Tape and Reel", Pricing 1="1=3.82000, 10=3.43000, 100=2.81000, 250=2.64000, 500=2.39000, 1000=2.02000 (USD)", RoHS=Yes, Stock 1=83975, Supplier 1=Mouser, Supplier 2=Newark, Supplier 3=Digi-Key, Supplier Part Number 2=33AH5407, Supplier Part Number 3=296-43922-1-ND, Width=0.11inch
U2: "IC REG LINEAR 1.8V 200MA SC70-5 Linear Voltage Regulator IC  1 Output  200mA SC-70-5", Case/Package=SC, Dropout Voltage=175mV, Manufacturer 1="Texas Instruments", Manufacturer Part Number 1=TLV70018DCKR, Manufacturer Part Number 2=TLV70018DCKT, Max Input Voltage=5.5V, Max Operating Temperature=125°C, Max Output Current=200mA, Max Output Voltage=1.8V, Max Power Dissipation=320mW, Min Current Limit=220mA, Min Input Voltage=2V, Min Operating Temperature=-40°C, Nominal Supply Current=31uA, Output Voltage Accuracy=2%, Package Quantity=1, Quiescent Current=30uA, Supplier Part Number 1=296-32409-1-ND, Accuracy=2%, ComponentLink1Description=https://datasheet.ciiva.com/41462/001014631-da-01-en-ic-reg-ldo-1-8v-0-tlv70018dckr-sot-5-tid-41462480.pdf?src-supplier=Conrad, ComponentLink1URL=https://datasheet.ciiva.com/41462/001014631-da-01-en-ic-reg-ldo-1-8v-0-tlv70018dckr-sot-5-tid-41462480.pdf?src-supplier=Conrad, ComponentLink2Description=https://datasheet.ciiva.com/22700/1882059-22700171.pdf?src-supplier=Element14, ComponentLink2URL=https://datasheet.ciiva.com/22700/1882059-22700171.pdf?src-supplier=Element14, ComponentLink3Description=https://datasheet.ciiva.com/14149/tlv700-eng-ds-14149837.pdf?src-supplier=Distrelec, ComponentLink3URL=https://datasheet.ciiva.com/14149/tlv700-eng-ds-14149837.pdf?src-supplier=Distrelec, ComponentLink4Description=https://datasheet.ciiva.com/7992/1882059-7992894.pdf?src-supplier=Element14, ComponentLink4URL=https://datasheet.ciiva.com/7992/1882059-7992894.pdf?src-supplier=Element14, Contact Plating=Gold, Height=1mm, Lead Free="Lead Free", Length=2.15mm, Manufacturer 2="Texas Instruments", Min Output Voltage=1.8V, Nominal Output Voltage=1.8V, Number of Outputs=1, Number of Pins=5, Number of Regulators=1, Output Current=200mA, Output Type=Fixed, Output Voltage=1.8V, Packaging="Tape and Reel", Polarity=Positive, Power Dissipation=320mW, Power Rating=320mW, Pricing 1="1=0.48000, 10=0.40900, 100=0.30570, 500=0.24020, 1000=0.18561 (USD)", Pricing 2="1=0.55000, 10=0.46700, 100=0.34900 (USD)", Radiation Hardening=No, REACH SVHC="No SVHC", RoHS=Yes, Stock 1=63905, Stock 2=13188, Supplier 1=Digi-Key, Supplier 2=Digi-Key, Supplier Part Number 2=296-25269-1-ND, Width=1.4mm
U3 U4: library part TXS0102DCUR, "TEXAS INSTRUMENTS - TXS0102DCUR - IC, TRANSLATOR, 2 BIT, BI, US-8", Case/Package=VSSOP, High Level Output Current=-20uA, Low Level Output Current=1mA, Manufacturer 1="Texas Instruments", Max Operating Temperature=85°C, Max Supply Voltage=5.5V, Min Operating Temperature=-40°C, Min Supply Voltage=1.65V, Nominal Supply Current=14.4uA, Output Current=1A, Package Quantity=1, Supplier Part Number 1=296-21931-1-ND, Category="Logic Gates", ComponentLink1Description=https://datasheet.ciiva.com/15096/getdatasheetpartid-118249-15096172.pdf?src-supplier=Verical, ComponentLink1URL=https://datasheet.ciiva.com/15096/getdatasheetpartid-118249-15096172.pdf?src-supplier=Verical, ComponentLink2Description=https://datasheet.ciiva.com/22653/1846850-22653373.pdf?src-supplier=Farnell, ComponentLink2URL=https://datasheet.ciiva.com/22653/1846850-22653373.pdf?src-supplier=Farnell, ComponentLink3Description=https://datasheet.ciiva.com/1508/1857232-1508821.pdf?src-supplier=Element14, ComponentLink3URL=https://datasheet.ciiva.com/1508/1857232-1508821.pdf?src-supplier=Element14, ComponentLink4Description=https://datasheet.ciiva.com/1899/txs0102-1899368.pdf?src-supplier=Digi-Key, ComponentLink4URL=https://datasheet.ciiva.com/1899/txs0102-1899368.pdf?src-supplier=Digi-Key, ComponentLink5Description=https://datasheet.ciiva.com/1899/txs0102-1899369.pdf?src-supplier=Digi-Key, ComponentLink5URL=https://datasheet.ciiva.com/1899/txs0102-1899369.pdf?src-supplier=Digi-Key, ComponentLink6Description=https://datasheet.ciiva.com/1899/txs0102-1899370.pdf?src-supplier=Digi-Key, ComponentLink6URL=https://datasheet.ciiva.com/1899/txs0102-1899370.pdf?src-supplier=Digi-Key, ComponentLink7Description=https://datasheet.ciiva.com/14287/txs0102-14287516.pdf?src-supplier=Avnet, ComponentLink7URL=https://datasheet.ciiva.com/14287/txs0102-14287516.pdf?src-supplier=Avnet, ComponentLink8Description=https://datasheet.ciiva.com/28499/1863639-28499676.pdf?src-supplier=Element14, ComponentLink8URL=https://datasheet.ciiva.com/28499/1863639-28499676.pdf?src-supplier=Element14, ComponentLink9Description=https://datasheet.ciiva.com/14287/txs0102-14287518.pdf?src-supplier=Avnet, ComponentLink9URL=https://datasheet.ciiva.com/14287/txs0102-14287518.pdf?src-supplier=Avnet, ComponentLink10Description=https://datasheet.ciiva.com/46395/1863639-46395871.pdf?src-supplier=Element14, ComponentLink10URL=https://datasheet.ciiva.com/46395/1863639-46395871.pdf?src-supplier=Element14, Data Rate=24Mbps, Lead Free="Lead Free", Logic Function=Translator, Manufacturer Part Number 1=TXS0102DCUR, Number of Bits=2, Number of Channels=2, Number of Inputs=2, Number of Pins=8, Output Type=Voltage, Packaging="Tape and Reel", Pricing 1="1=0.75000, 10=0.65900, 25=0.61960, 100=0.50550, 250=0.46956, 500=0.39964, 1000=0.31971 (USD)", Propagation Delay=4.6ns, Quiescent Current=14.4uA, Radiation Hardening=No, REACH SVHC="No SVHC", RoHS=Yes, Stock 1=55123, Supplier 1=Digi-Key, Supplier 2=Newark, Supplier 3=Mouser, Supplier Part Number 2=30M1878, Supplier Part Number 3=595-TXS0102DCUR, Turn-On Delay Time=260ns, Weight=0.000339oz

## Via types
v1: diameter 19.68, hole 9.84, Top Layer to Bottom Layer, tented both sides, 74 vias

## Nets (pads, with @x,y where several pads share a name; then routed paths per layer and width w, separated by ;. In a path a pad name is that pad's centre, name@x,y a point inside that pad or via, vN(x,y) a via of type N, cw(c..) or ccw(c..) an arc to the next point about the centre after c; other vN are vias at no path point)
1V8: C5.2 C6.2 C8.2 R7.2 R8.2 TP9.1 U2.5 U3.3 U4.3 | length 1667.6
  Top Layer w4: R7.2 49.21,679.13 v1(49.21,659.97) ; v1(59.06,364.17) R8.2
  Top Layer w7.87: C6.2 v1(49.21,482.28) 68.9,462.6 143.03,462.6 147.64,467.21 U3.3 ; v1(157.48,305.12) U4.3 157.48,226.38 C8.2
  Top Layer w15.75: v1(832.68,594.49) U2.5 860.24,604.33 872.05,616.14 872.05,657.48 C5.2
  MidLayer 1 w15.75: v1(157.48,305.12) 156.41,305.12 144.54,293.24 118.96,293.24 59.81,352.39 59.81,363.42 v1(59.06,364.17) 59.06,365.24 49.21,375.08 v1(49.21,659.97) 50.28,659.97 61.63,671.32 755.84,671.32 v1(832.68,594.49)
3V3: C2.1 C4.2 C7.2 C9.2 J1.P1 R5.1 TP5.1 U1.4 U1.5 U2.1 U2.3 U3.7 U4.7 | length 1980
  Top Layer w4: R5.1 813.49,442.91 814.51,443.93 844.46,443.93 C4.2@852.85,435.53
  Top Layer w7.87: C7.2 57.48,636.22 81.84,636.22 95.23,649.61 118.11,649.61 127.95,639.76 U3.7 ; C9.2 96.17,352.07 103.55,352.07 v1@107.09,355.62 ; v1(105.81,354.33) v1@107.09,355.62 ; U4.7 137.32,395.19 137.32,373.54 119.4,355.62 v1@107.09,355.62
  Top Layer w15.75: J1.P1 C2.1 845.44,562.99 859.22,549.21 859.22,542.81 v1(859.98,542.06) ; U1.5 865.16,393.7 ; U2.3 911.42,517.72 905.57,523.56 905.57,530.51 898.62,537.46 865.64,537.46 861.04,542.06 v1(859.98,542.06) ; U1.4 906.5,393.7 865.16,393.7 ; v1(859.98,542.06) 860.24,541.8 860.24,440.94 C4.2 865.16,430.12 865.16,393.7
  MidLayer 1 w15.75: v1(98.43,649.61) 425.8,649.61 533.35,542.06 v1(859.98,542.06) ; v1@99.18,648.54 99.18,647.79 100.89,646.08 100.89,600.81 116.08,585.62 116.08,515.08 100.89,499.88 100.89,360.32 105.81,355.4 v1(105.81,354.33)
3V3_PG: TP6.1 U1.7 | length 129.6
  Top Layer w4: TP6.1 760.83,321.85 U1.7
AUX_IO1: J2.23 R10.1 TP18.1 | length 192.1
  Top Layer w4: R10.1 667.42,309.06 688.98,287.5 v1(688.98,236.22) 679.49,226.73 J2.23
AUX_IO1_1V8: R10.2 U3.4 | length 542.3
  Top Layer w4: U3.4 v1(194.88,490.16) ; R10.2 v1(639.76,421.26)
  MidLayer 1 w4: v1(194.88,490.16) 195.3,490.16 242.54,442.91 618.11,442.91 v1(639.76,421.26)
AUX_IO2: J2.24 TP19.1 | length 88.6
  Top Layer w4: v1(699.17,68.9) J2.24
CAM_CLK: J2.17 TP14.1 | length 88.6
  Top Layer w4: v1(561.38,68.9) J2.17
CAM_RST: J2.18 R9.1 TP15.1 | length 223.8
  Top Layer w4: R9.1 494.42,257.55 520.01,257.55 543.62,233.94 543.62,224.1 581.06,186.65 J2.18
  other v1: 541.34,236.22
CAM_RST_1V8: R9.2 U3.5 | length 510.3
  Top Layer w4: U3.5 169.29,610.24 171.26,612.2 v1(188.98,612.2) v1@194.88,612.2 ; R9.2 v1(442.91,421.26)
  MidLayer 1 w4: v1(188.98,612.2) 188.98,602.36 167.32,580.71 167.32,482.28 228.35,421.26 v1(442.91,421.26)
CAM_RST_3V3: R1.1 U3.8 | length 293
  Top Layer w4: U3.8 108.27,590.46 140.72,558.01 292.39,558.01 R1.1
ENABLE: J1.P5 R1.2 TP1.1 | length 531.7
  Top Layer w4: R1.2 399.73,632.02 580.83,632.02 610.24,661.42 610.24,740.91 649.61,780.28 v1(649.61,875.98)
FB_3.3VIN: R5.2 R6.1 U1.6 | length 225.7
  Top Layer w4: R5.2 757.87,440.94 740.16,423.23 R6.1 728.35,403.54 748.03,403.54 799.49,352.08 839.85,352.08 U1.6
GND: C1.1 C2.2 C3.1 C4.1 C5.1 C6.1 C7.1 C8.1 C9.1 J1.P6 J1.P9 J1.P12 J1.P15 J2.1 J2.4 J2.7 J2.10 J2.13 J2.16 J2.19 J2.22 J2.MP1 J2.MP2 R6.2 TP7.1 TP8.1 U1.3 U1.9 U2.2 U3.2 U4.2 | length 2273.1
  Top Layer w4: J2.MP1 156.85,126.97 v1(167.68,137.8) ; J1.P15 216.54,748.03 v1(236.22,767.72) ; J2.1 v1(246.42,118.11) v1(305.47,118.11) J2.4 ; v1(314.96,767.72) 334.65,748.03 ; J1.P12 334.65,748.03 ; v1(354.33,767.72) 334.65,748.03 ; v1(364.53,196.85) J2.7 v1(364.53,118.11) 384.21,98.43 411.4,98.43 414.23,101.25 414.23,104.51 422.9,113.18 v1@422.9,117.43 ; v1(422.21,116.74) v1@422.9,117.43 ; v1(423.58,196.85) J2.10 422.9,156.8 v1@422.9,117.43 ; v1(433.07,767.72) 452.76,748.03 ; J1.P9 452.76,748.03 ; v1(472.44,767.72) 452.76,748.03 ; J2.13 v1(482.64,118.11) v1(541.69,118.11) J2.16 ; v1(551.18,767.72) 570.87,748.03 J1.P6 ; v1(600.75,118.11) J2.19 ; v1(659.8,118.11) J2.22 ; R6.2 v1(708.66,492.13) ; v1(740.16,248.03) C3.1 ; v1(817.28,137.8) 828.11,126.97 J2.MP2
  Top Layer w7.87: C6.1 57.48,549.61 68.06,549.61 79.48,561.02 v1(82.68,561.02) 80.71,561.02 C7.1 ; C9.1 67.32,271.26 67.32,218.11 v1(68.9,216.54) ; v1(127.95,314.96) 137.8,305.12 137.8,236.22 137.51,235.94 137.51,222.16 C8.1 ; U3.2 127.95,518.46 137.8,528.3 v1(137.8,531.5)
  Top Layer w15.75: C2.2 799.21,500 v1(807.09,492.13) ; v1(885.83,277.62) U1.9 898.62,347.44 U1.3 ; U2.2 885.83,498.03 891.67,492.19 891.67,485.24 898.62,478.28 908.45,478.28 919.21,467.52 v1(920.28,467.52) C4.1 ; v1(917.32,177.17) C1.1 ; v1(935.04,728.35) 935.04,661.42 C5.1
  Bottom Layer w4: v1(364.17,620.08) 344.49,600.39 344.49,226.38 354.33,216.54 354.33,207.05 v1(364.53,196.85)
  other v1: 206.69,314.96 492.13,501.97 590.55,501.97 275.59,531.5 53.83,729.53 413.39,895.67
GPI: J1.P4 R2.2 TP2.1 | length 346.4
  Top Layer w4: R2.2 490.16,624.02 612.2,624.02 649.61,661.42 649.61,734.91 669.29,754.59 v1(669.29,757.87)
HSYN_3V3: R2.1 U3.1 | length 429.8
  Top Layer w4: U3.1 108.27,524.37 131.23,547.34 228.75,547.34 311.52,464.57 401.57,464.57 R2.1
I2C_SCL: J2.21 R11.1 TP17.1 | length 204.5
  Top Layer w4: R11.1 568.99,309.06 629.92,248.13 ; J2.21 v1@640.12,248.13
  other v1: 640.12,246.06
I2C_SCL_1V8: R11.2 U4.5 | length 460.7